# EAGLE board AK4493-v1.64_25 (EAGLE 9.6.2), part 1 of 2
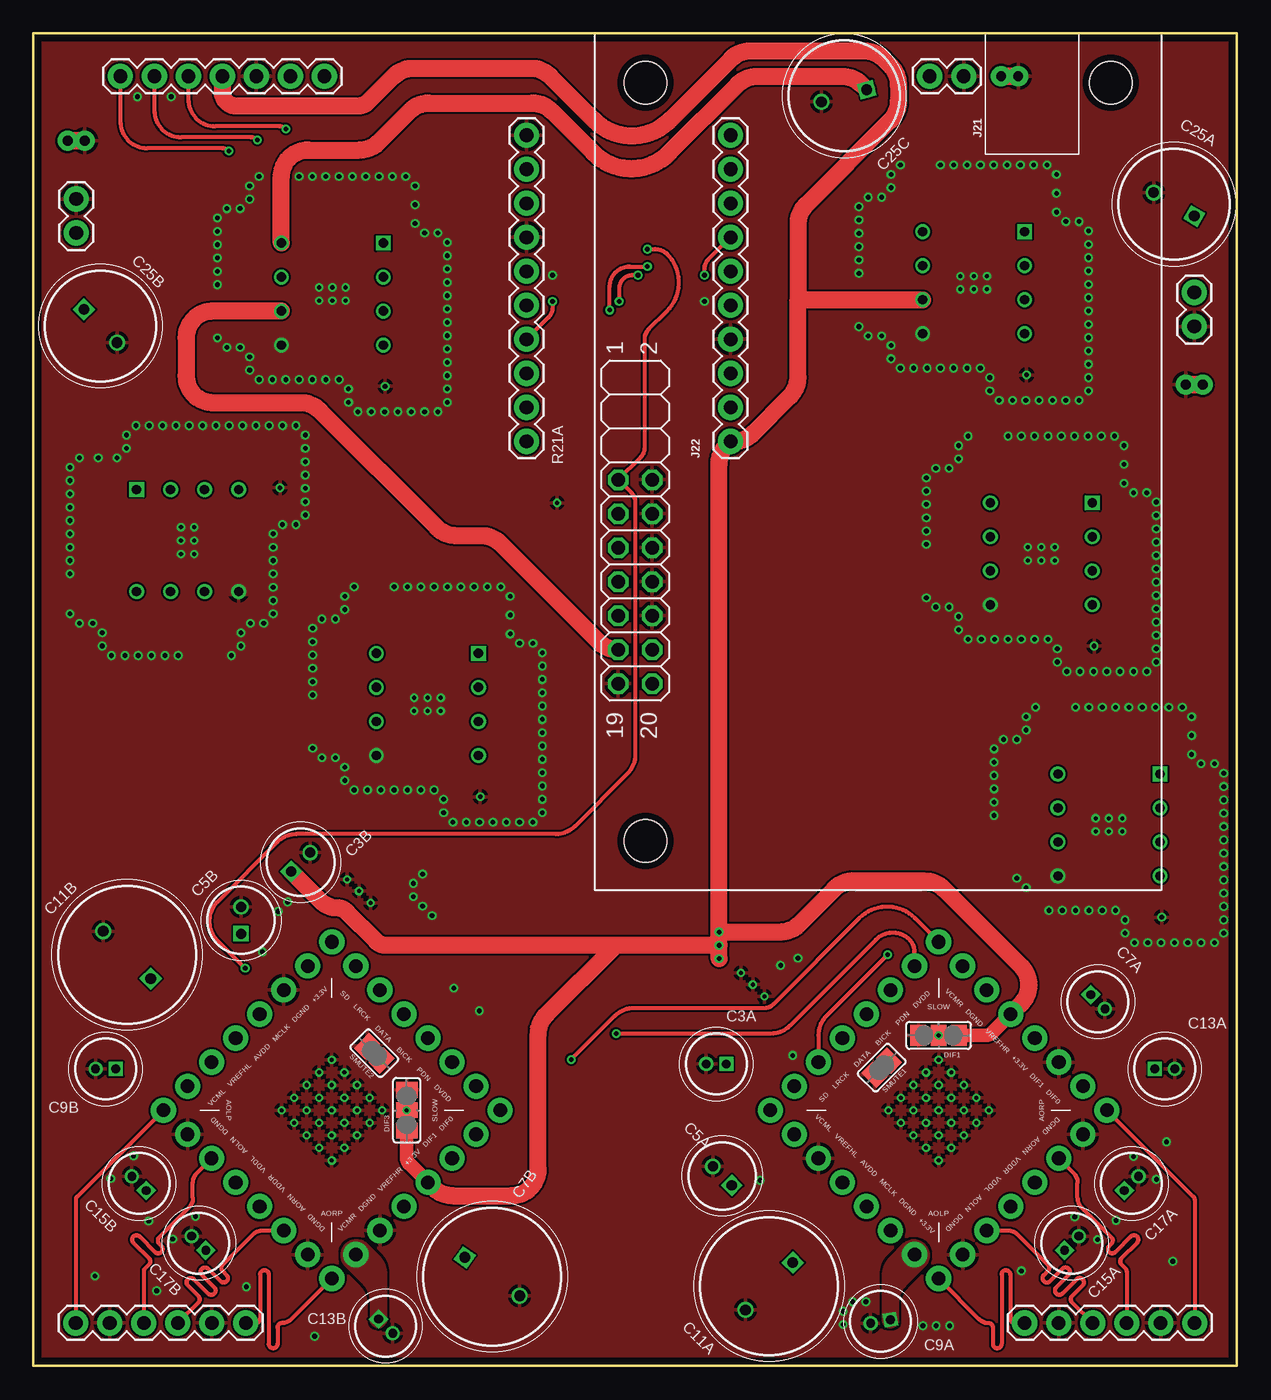
[diagram p0: board, top side]
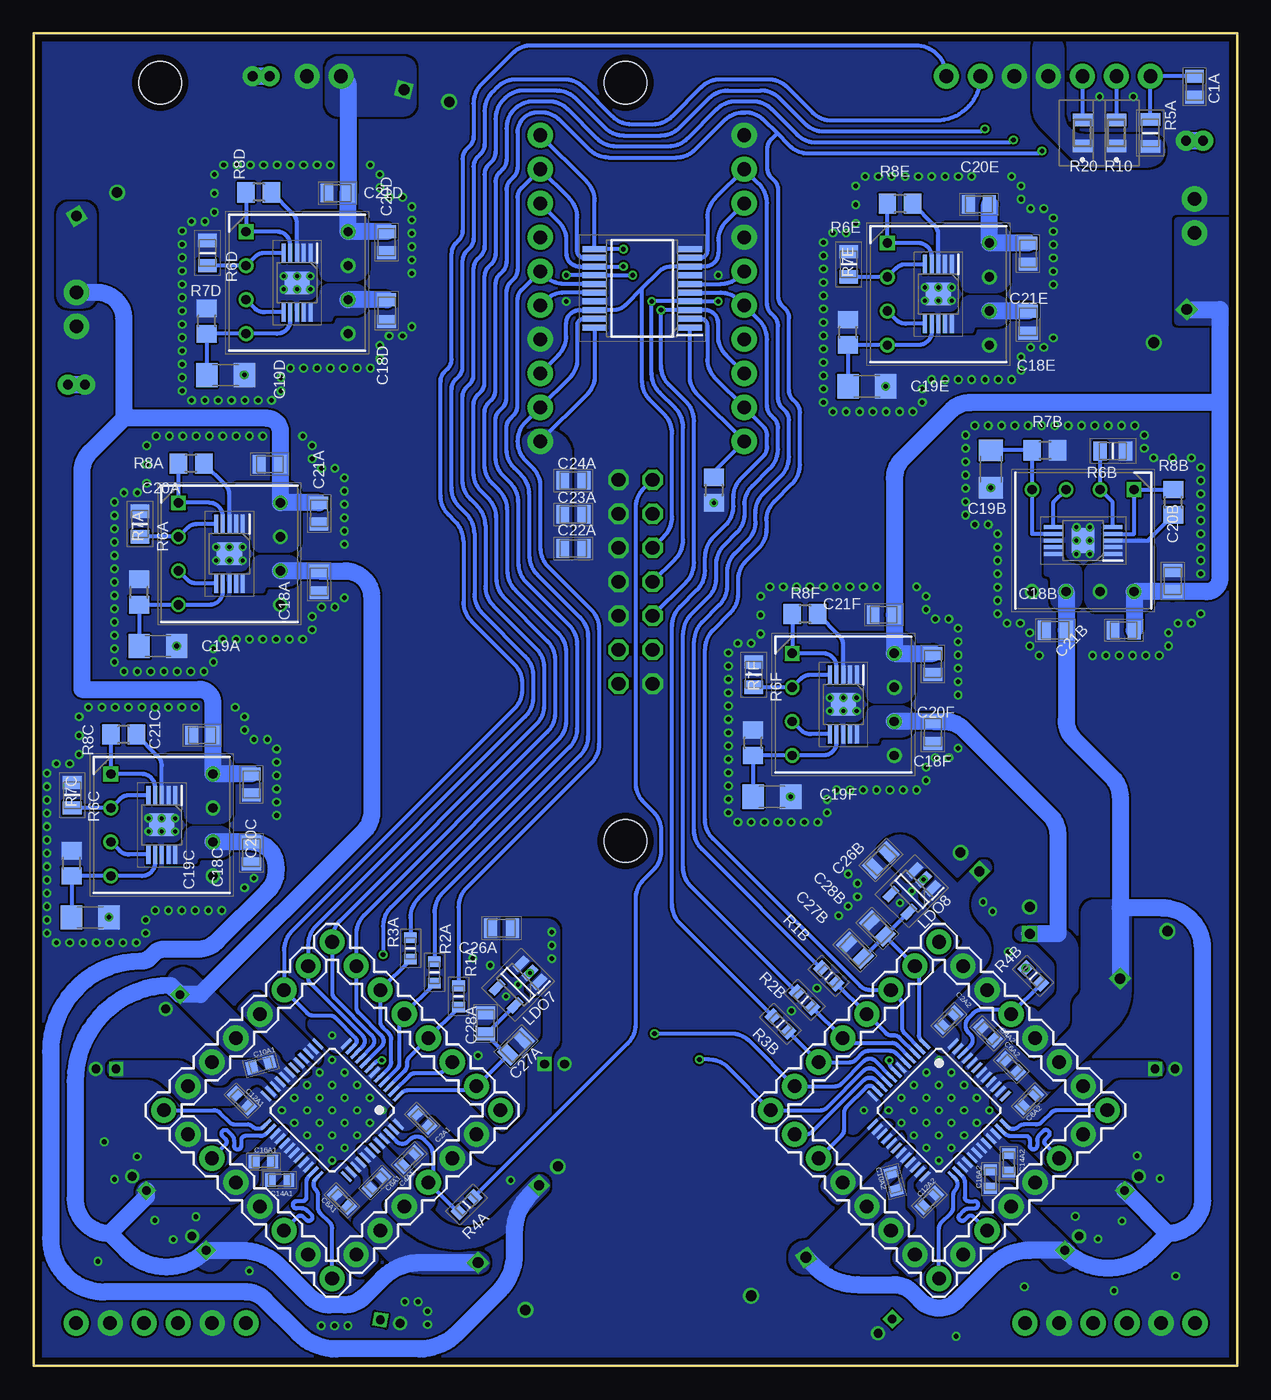
[diagram p1: board, bottom side, seen from below]

Size 89.89 x 99.5 mm. Coordinates in mm from the lower left corner, seen from the top.
Outline: 0,99.5 89.89,99.5 89.89,0 0,0 0,99.5
Copper layers (1*16): Top 0.035mm / dielectric 1.6mm / Bottom 0.035mm
Design rules "Elecrow_2-layer_PCB_eagle_rule": minimum track width 6mil, minimum drill 12mil, track to track 6mil, track to pad 6mil, pad to pad 6mil, via to via 8mil, smd to smd 0mil, copper to edge 20mil, drill to drill 10mil, minimum pad ring 6mil, minimum via ring 6mil, stop-mask expansion 0mil, vias tented up to drill 100mil, thermal gap 10mil
Net classes: 3 Power: width 1.27 mm, drill 1.27 mm, clearance 0.254 mm

## Footprints (pad centres in the part's own frame; a part is rotated, then mirrored left to right if it is on the bottom)
I2SOVERUSBV3 = drill 1.016 octagon: H3.7 33.322,1.745; H3.8 33.322,4.285; H3.9 35.862,1.745; H3.10 35.862,4.285; H3.11 38.403,1.745; H3.12 38.403,4.285; H3.13 40.943,1.745; H3.14 40.943,4.285; H3.15 43.483,1.745; H3.16 43.483,4.285; H3.17 46.023,1.745; H3.18 46.023,4.285; H3.19 48.562,1.745; H3.20 48.562,4.285 | hole 3.175: 3.688,3.775; 3.688,38.525; 60.312,3.775
CAPC2012X135N = smd 0.96 x 1.39: 1 -0.79,0; 2 0.79,0
CAPC1608X95N = smd 0.81 x 0.99: 1 -0.69,0; 2 0.69,0
CAPPRD150W45D450H600 = drill 0.65 pad 1.05 square: 1 0,0 | drill 0.65 pad 1.05: 2 1.5,0
CAPPRD200W55D500H800 = drill 0.75 pad 1.15 square: 1 0,0 | drill 0.75 pad 1.15: 2 2,0
CAPPRD500W60D1025H2150 = drill 0.8 pad 1.2 square: 1 0,0 | drill 0.8 pad 1.2: 2 5,0
CAPC2013X140N = smd 0.96 x 1.44: 1 -0.82,0; 2 0.82,0
C1206 = smd 1.6 x 1.8: 1 -1.4,0; 2 1.4,0 | drill 0.35: DGND 1.4,0
CAPPRD350W60D825H1300 = drill 0.8 pad 1.2 square: 1 0,0 | drill 0.8 pad 1.2: 2 3.5,0
SJ_2 = smd 1.168 x 1.6: 1 -1.524,0; 2 0,0; 3 1.524,0
SOP50P490X110-11N = smd 1.425 x 0.3: 1 -2.212,1; 2 -2.212,0.5; 3 -2.212,0; 4 -2.212,-0.5; 5 -2.212,-1; 6 2.212,-1; 7 2.212,-0.5; 8 2.212,0; 9 2.212,0.5; 10 2.212,1 | smd 1.68 x 1.88: 11 0,0 | drill 0.305 pad 0.61: P$1 -0.498,0; P$2 0.498,0; P$3 -0.498,0.995; P$4 0.498,0.995; P$5 -0.498,-0.995; P$6 0.498,-0.995
LQFP48_ = smd 0.25 x 1: 1 -2.75,-4.25; 2 -2.25,-4.25; 3 -1.75,-4.25; 4 -1.25,-4.25; 5 -0.75,-4.25; 6 -0.25,-4.25; 7 0.25,-4.25; 8 0.75,-4.25; 9 1.25,-4.25; 10 1.75,-4.25; 11 2.25,-4.25; 12 2.75,-4.25; 25 2.75,4.25; 26 2.25,4.25; 27 1.75,4.25; 28 1.25,4.25; 29 0.75,4.25; 30 0.25,4.25; 31 -0.25,4.25; 32 -0.75,4.25; 33 -1.25,4.25; 34 -1.75,4.25; 35 -2.25,4.25; 36 -2.75,4.25 | smd 1 x 0.25: 13 4.25,-2.75; 14 4.25,-2.25; 15 4.25,-1.75; 16 4.25,-1.25; 17 4.25,-0.75; 18 4.25,-0.25; 19 4.25,0.25; 20 4.25,0.75; 21 4.25,1.25; 22 4.25,1.75; 23 4.25,2.25; 24 4.25,2.75; 37 -4.25,2.75; 38 -4.25,2.25; 39 -4.25,1.75; 40 -4.25,1.25; 41 -4.25,0.75; 42 -4.25,0.25; 43 -4.25,-0.25; 44 -4.25,-0.75; 45 -4.25,-1.25; 46 -4.25,-1.75; 47 -4.25,-2.25; 48 -4.25,-2.75 | drill 0.305 pad 0.61: P$1 0,0; P$2 -1.327,0; P$3 -2.655,0; P$4 1.327,0; P$5 2.655,0; P$6 0,1.327; P$7 0,2.655; P$8 0,-1.327; P$9 0,-2.655; P$10 -1.327,-1.327; P$11 -2.655,-1.327; P$12 -2.655,-2.655; P$13 -1.327,-2.655; P$14 1.327,-2.655; P$15 2.655,-2.655; P$16 2.655,-1.327; P$17 1.327,-1.327; P$18 1.327,1.327; P$19 2.655,1.327; P$20 2.655,2.655; P$21 1.327,2.655; P$22 -1.327,2.655; P$23 -2.655,2.655; P$24 -2.655,1.327; P$25 -1.327,1.327
SOP65P780X200-20N = smd 1.8 x 0.45: 1 -3.55,2.925; 2 -3.55,2.275; 3 -3.55,1.625; 4 -3.55,0.975; 5 -3.55,0.325; 6 -3.55,-0.325; 7 -3.55,-0.975; 8 -3.55,-1.625; 9 -3.55,-2.275; 10 -3.55,-2.925; 11 3.55,-2.925; 12 3.55,-2.275; 13 3.55,-1.625; 14 3.55,-0.975; 15 3.55,-0.325; 16 3.55,0.325; 17 3.55,0.975; 18 3.55,1.625; 19 3.55,2.275; 20 3.55,2.925
1X02 = drill 1.016 pad 1.88: 1 0,0; 2 2.54,0
1X07 = drill 1.016 pad 1.88: 1 0,0; 2 2.54,0; 3 5.08,0; 4 7.62,0; 5 10.16,0; 6 12.7,0; 7 15.24,0
1X06 = drill 1.016 pad 1.88: 1 0,0; 2 2.54,0; 3 5.08,0; 4 7.62,0; 5 10.16,0; 6 12.7,0
DIPS762W51P254L1016H390Q8N = drill 0.7 pad 1.1 square: 1 0,0 | drill 0.7 pad 1.1: 2 0,-2.54; 3 0,-5.08; 4 0,-7.62; 5 7.62,-7.62; 6 7.62,-5.08; 7 7.62,-2.54; 8 7.62,0
1X10 = drill 1.016 pad 1.88: 1 0,0; 2 2.54,0; 3 5.08,0; 4 7.62,0; 5 10.16,0; 6 12.7,0; 7 15.24,0; 8 17.78,0; 9 20.32,0; 10 22.86,0
SOT95P280X145-5N = smd 1.2 x 0.6: 1 -1.25,0.95; 2 -1.25,0; 3 -1.25,-0.95; 4 1.25,-0.95; 5 1.25,0.95 | drill 0.305 pad 0.61: DGND -1.25,0; DGND2 0,0; DGND3 1.25,0
RESC1608X55N = smd 0.8 x 0.95: 1 -0.8,0; 2 0.8,0
RESC2012X50N = smd 0.95 x 1.45: 1 -1,0; 2 1,0
RESC2012X60N = smd 1 x 1.4: 1 -0.95,0; 2 0.95,0
R0805 = smd 1.3 x 1.5: 1 -0.95,0; 2 0.95,0
RCS0805_E3 = smd 0.95 x 1.45: 1 -0.975,0; 2 0.975,0
R0805-POL = smd 1.3 x 1.5: 1 -0.95,0; 2 0.95,0 | drill 0.305 pad 0.61: DGND 0.95,0
SHORT_ALL-50 = drill 0.737 pad 1.524: 1 -0.635,0; 2 0.635,0
SJ = smd 1.168 x 1.6: 1 -0.762,0; 2 0.762,0

## Placement (x,y rotation side)
BD1  I2SOVERUSBV3  [I2SOVERUSBV3]  41.93,99.5 270 top
C1A  0.1uF, X7R  [CAPC2012X135N]  3.19,95.52 270 bottom
C2A1  0.1u, Ceramic Capacitor X7R  [CAPC1608X95N]  60.87,18.35 315 bottom
C2A2  0.1u, Ceramic Capacitor X7R  [CAPC1608X95N]  21.55,25.82 45 bottom
C3A  80-A758BG106M1EAAE70  [CAPPRD150W45D450H600]  51.75,22.53 180 top
C3B  80-A758BG106M1EAAE70  [CAPPRD200W55D500H800]  19.25,36.9 45 top
C4A1  0.1u, Ceramic Capacitor X7R  [CAPC1608X95N]  61.86,15.42 45 bottom
C4A2  0.1u, Ceramic Capacitor X7R  [CAPC1608X95N]  18.62,24.83 135 bottom
C5A  80-A758BG106M1EAAE70  [CAPPRD200W55D500H800]  52.15,13.47 135 top
C5B  80-A758BG106M1EAAE70  [CAPPRD200W55D500H800]  15.5,32.26 90 top
C6A1  0.1u, Ceramic Capacitor X7R  [CAPC1608X95N]  64.3,13.68 225 bottom
C6A2  0.1u, Ceramic Capacitor X7R  [CAPC1608X95N]  16.88,22.39 315 bottom
C7A  RNU1A100MDSASQ  [CAPPRD150W45D450H600]  78.97,27.72 315 top
C7B  APSG160ELL222MJ20S  [CAPPRD500W60D1025H2150]  32.22,8.09 325 top
C8A1  0.1u, Ceramic Capacitor X7R  [CAPC1608X95N]  66.88,12.34 315 bottom
C8A2  0.1u, Ceramic Capacitor X7R  [CAPC1608X95N]  15.54,19.81 45 bottom
C9A  647-RNU1A100MDSASQ  [CAPPRD150W45D450H600]  64,3.44 190 top
C9B  647-RNU1A100MDSASQ  [CAPPRD150W45D450H600]  6.14,22.17 180 top
C10A1  0.1u, Ceramic Capacitor X7R  [CAPC1608X95N]  72.93,22.46 195 bottom
C10A2  0.1u, Ceramic Capacitor X7R  [CAPC1608X95N]  25.66,13.75 285 bottom
C11A  APSG160ELL222MJ20S  [CAPPRD500W60D1025H2150]  56.71,7.7 225 top
C11B  2200uF, 10V  [CAPPRD500W60D1025H2150]  8.75,28.92 135 top
C12A1  0.1u, Ceramic Capacitor X7R  [CAPC1608X95N]  74.34,19.8 315 bottom
C12A2  0.1u, Ceramic Capacitor X7R  [CAPC1608X95N]  23.01,12.34 45 bottom
C13A  647-RNU1A100MDSASQ  [CAPPRD150W45D450H600]  83.75,22.17 0 top
C13B  647-RNU1A100MDSASQ  [CAPPRD150W45D450H600]  25.77,3.49 315 top
C14A1  0.1u, Ceramic Capacitor X7R  [CAPC1608X95N]  71.53,13.86 180 bottom
C14A2  0.1u, Ceramic Capacitor X7R  [CAPC1608X95N]  17.06,15.15 270 bottom
C15A  647-RNU1A100MDSASQ  [CAPPRD150W45D450H600]  77.01,8.62 45 top
C15B  647-RNU1A100MDSASQ  [CAPPRD150W45D450H600]  8.41,13.08 135 top
C16A1  0.1u, Ceramic Capacitor X7R  [CAPC1608X95N]  72.74,15.24 0 bottom
C16A2  0.1u, Ceramic Capacitor X7R  [CAPC1608X95N]  18.45,13.95 90 bottom
C17A  647-RNU1A100MDSASQ  [CAPPRD150W45D450H600]  81.48,13.08 45 top
C17B  647-RNU1A100MDSASQ  [CAPPRD150W45D450H600]  12.88,8.62 135 top
C18A  4.7u  [CAPC2013X140N]  68.58,58.55 270 bottom
C18B  4.7u  [CAPC2013X140N]  13.6,54.93 180 bottom
C18C  4.7u  [CAPC2013X140N]  73.63,38.3 270 bottom
C18D  4.7u  [CAPC2013X140N]  63.53,78.8 270 bottom
C18E  4.7u  [CAPC2013X140N]  15.63,77.95 270 bottom
C18F  4.7u  [CAPC2013X140N]  22.73,47.3 270 bottom
C19A  22u  [C1206]  80.62,53.74 0 bottom
C19B  22u  [C1206]  18.41,66.97 270 bottom
C19C  22u  [C1206]  85.67,33.49 0 bottom
C19D  22u  [C1206]  75.57,73.99 0 bottom
C19E  22u  [C1206]  27.67,73.14 0 bottom
C19F  22u  [C1206]  34.77,42.49 0 bottom
C20A  10u  [CAPC2012X135N]  72.26,67.33 180 bottom
C20B  10u  [CAPC2012X135N]  4.82,58.61 90 bottom
C20C  10u  [CAPC2012X135N]  73.63,43.41 270 bottom
C20D  10u  [CAPC2012X135N]  63.53,83.91 270 bottom
C20E  10u  [CAPC2012X135N]  19.31,86.73 180 bottom
C20F  10u  [CAPC2012X135N]  22.73,52.41 270 bottom
C21A  0.1u  [CAPC2012X135N]  68.58,63.66 270 bottom
C21B  0.1u  [CAPC2012X135N]  8.49,54.93 180 bottom
C21C  0.1u  [CAPC2012X135N]  77.31,47.08 180 bottom
C21D  0.1u  [CAPC2012X135N]  67.21,87.58 180 bottom
C21E  0.1u  [CAPC2012X135N]  15.63,83.06 270 bottom
C21F  0.1u  [CAPC2012X135N]  26.41,56.08 180 bottom
C22A  0.1u, Ceramic Capacitor X7R  [CAPC2012X135N]  49.59,61.03 0 bottom
C23A  0.1u, Ceramic Capacitor X7R  [CAPC2012X135N]  49.59,63.57 0 bottom
C24A  0.1u, Ceramic Capacitor X7R  [CAPC2012X135N]  49.59,66.11 0 bottom
C25A  470u  [CAPPRD350W60D825H1300]  86.7,85.87 150 top
C25B  470u  [CAPPRD350W60D825H1300]  3.77,78.89 315 top
C25C  470u  [CAPPRD350W60D825H1300]  62.24,95.3 195 top
C26A  4.7u, Ceramic Capacitor X7R  [CAPC2013X140N]  54.96,32.68 180 bottom
C26B  4.7u, Ceramic Capacitor X7R  [CAPC2013X140N]  26.62,37.76 225 bottom
C27A  4.7u, Ceramic Capacitor X7R  [CAPC2013X140N]  53.87,23.84 45 bottom
C27B  4.7u, Ceramic Capacitor X7R  [CAPC2013X140N]  28.55,31.02 135 bottom
C28A  0.1u, Ceramic Capacitor X7R  [CAPC2012X135N]  56.14,25.57 90 bottom
C28B  0.1u, Ceramic Capacitor X7R  [CAPC2012X135N]  26.87,32.66 135 bottom
DIF1  [SJ_2]  67.61,24.67 0 top
DIF3  [SJ_2]  27.88,19.08 270 top
IC1  LT3042  [SOP50P490X110-11N]  75.28,60.64 270 bottom
IC2  AK4493  [LQFP48_]  67.61,19.08 135 bottom
IC3  AK4493  [LQFP48_]  22.28,19.08 225 bottom
IC4  LT3042  [SOP50P490X110-11N]  80.33,40.39 270 bottom
IC4A  SN74ABT273DBR  [SOP65P780X200-20N]  44.44,80.47 180 bottom
IC5  LT3042  [SOP50P490X110-11N]  11.51,61.63 180 bottom
IC6  LT3042  [SOP50P490X110-11N]  70.23,80.89 270 bottom
IC7  LT3042  [SOP50P490X110-11N]  29.43,49.39 270 bottom
IC8  LT3042  [SOP50P490X110-11N]  22.33,80.04 270 bottom
J1  [1X02]  3.19,84.6 90 top
J2  [1X02]  66.94,96.31 0 top
J3  [1X07]  6.49,96.31 0 top
J4  [1X06]  74.03,3.19 0 top
J5  [1X07]  80.18,19.08 45 bottom
J6  [1X07]  67.61,6.51 135 bottom
J7  [1X07]  55.03,19.08 225 bottom
J8  [1X07]  67.61,31.65 315 bottom
J9  [1X07]  22.28,6.51 135 bottom
J10  [1X07]  9.71,19.08 225 bottom
J11  [1X07]  22.28,31.65 315 bottom
J12  [1X07]  34.85,19.08 45 bottom
J13  [1X06]  3.16,3.19 0 top
J14  [1X02]  86.7,80.16 270 top
J15  XR2A-0811-N  [DIPS762W51P254L1016H390Q8N]  79.09,64.45 0 bottom
J16  XR2A-0811-N  [DIPS762W51P254L1016H390Q8N]  84.14,44.2 0 bottom
J17  XR2A-0811-N  [DIPS762W51P254L1016H390Q8N]  7.7,65.44 270 bottom
J18  XR2A-0811-N  [DIPS762W51P254L1016H390Q8N]  74.04,84.7 0 bottom
J19  XR2A-0811-N  [DIPS762W51P254L1016H390Q8N]  33.24,53.2 0 bottom
J20  XR2A-0811-N  [DIPS762W51P254L1016H390Q8N]  26.14,83.85 0 bottom
J21  [1X10]  36.82,91.9 270 top
J22  [1X10]  52.06,69.04 90 top
LDO7  LP5907-1.8V  [SOT95P280X145-5N]  53.72,28.46 225 bottom
LDO8  LP5907-1.8V  [SOT95P280X145-5N]  24.31,35.44 225 bottom
R1A  RT0603DRE075R1L  [RESC1608X55N]  58.17,27.57 270 bottom
R1B  RT0603DRE075R1L  [RESC1608X55N]  30.53,29.12 315 bottom
R2A  RT0603DRE075R1L  [RESC1608X55N]  59.96,29.37 270 bottom
R2B  RT0603DRE075R1L  [RESC1608X55N]  32.32,27.32 315 bottom
R3A  RT0603DRE075R1L  [RESC1608X55N]  61.76,31.16 270 bottom
R3B  RT0603DRE075R1L  [RESC1608X55N]  34.12,25.53 315 bottom
R4A  RT0603DRE075R1L  [RESC1608X55N]  57.57,12.04 225 bottom
R4B  RT0603DRE075R1L  [RESC1608X55N]  15.24,29.12 315 bottom
R5A  10K, Resistor 1%  [RESC2012X50N]  6.49,92.07 270 bottom
R6A  1k  [RESC2012X60N]  81.97,62.86 90 bottom
R6B  1k  [RESC2012X60N]  9.29,68.32 0 bottom
R6C  1k  [RESC2012X60N]  87.02,42.61 90 bottom
R6D  1k  [RESC2012X60N]  76.92,83.11 90 bottom
R6E  1k  [RESC2012X60N]  29.02,82.26 90 bottom
R6F  1k  [RESC2012X60N]  36.12,51.61 90 bottom
R7A  33k  [R0805]  82.02,57.78 90 bottom
R7B  33k  [R0805]  14.37,68.37 0 bottom
R7C  33k  [R0805]  87.07,37.53 90 bottom
R7D  33k  [R0805]  76.97,78.03 90 bottom
R7E  33k  [R0805]  29.07,77.18 90 bottom
R7F  33k  [R0805]  36.17,46.53 90 bottom
R8A  200k  [R0805]  78.14,67.38 180 bottom
R8B  200k  [R0805]  4.77,64.49 90 bottom
R8C  200k  [R0805]  83.19,47.13 180 bottom
R8D  200k  [R0805]  73.09,87.63 180 bottom
R8E  200k  [R0805]  25.19,86.78 180 bottom
R8F  200k  [R0805]  32.29,56.13 180 bottom
R10  2.2k, 1%  [RCS0805_E3]  9.03,92.07 90 bottom
R20  2.2k, 1%  [RCS0805_E3]  11.57,92.07 90 bottom
R21A  Not Pop.  [R0805-POL]  39.1,65.39 270 bottom
SH1  SHORTA5  [SHORT_ALL-50]  3.19,91.49 180 top
SH2  SHORTA5  [SHORT_ALL-50]  72.91,96.31 180 top
SH3  SHORTA5  [SHORT_ALL-50]  86.7,73.27 0 top
SMUTE1  [SJ]  63.35,22.26 225 top
SMUTE2  [SJ]  25.46,23.33 135 top

## Library data of the parts
BD1 = Dual Mono Amp Library; BOM: Yes; DESCRIPTION: Asynchronous audio transfer at sampling rates up to 768 kHz and 32 bit
C1A C21A C21B C21C C21D C21E C21F C22A C23A C24A C28A C28B = Dual Mono Amp Library; DESCRIPTION: Multilayer Ceramic Capacitors MLCC - SMD/SMT 0805 16VDC 0.1uF 10% X7R AEC-Q200; HEIGHT: 1.35mm; MANUFACTURER_NAME: TAIYO YUDEN; MANUFACTURER_PART_NUMBER: EMF212B7104KGHT; MOUSER_PART_NUMBER: 963-EMF212B7104KGHT; MOUSER_PRICE-STOCK: https://www.mouser.co.uk/ProductDetail/Taiyo-Yuden/EMF212B7104KGHT?qs=%252B6g0mu59x7JRGtoE3odDgw%3D%3D
C2A1 C2A2 C4A1 C4A2 C6A1 C6A2 C8A1 C8A2 C10A1 C10A2 C12A1 C12A2 C14A1 C14A2 C16A1 C16A2 = Dual Mono Amp Library; DESCRIPTION: EMK107B7104KA-T 0.1F +/-10% 16V Ceramic Capacitor X7R 0603; HEIGHT: 0.95mm; MANUFACTURER_NAME: TAIYO YUDEN; MANUFACTURER_PART_NUMBER: EMK107B7104KA-T; MOUSER_PART_NUMBER: 963-EMK107B7104KA-T; MOUSER_PRICE-STOCK: https://www.mouser.co.uk/ProductDetail/TAIYO-YUDEN/EMK107B7104KA-T?qs=I6KAKw0tg2ybqzX8hKPgfw%3D%3D
C3A C7A C9A C9B C13A C13B C15A C15B C17A C17B = Dual Mono Amp Library; DESCRIPTION: Aluminum Organic Polymer Capacitors 10 Volt 10uF 20%; HEIGHT: 6mm; MANUFACTURER_NAME: Nichicon; MANUFACTURER_PART_NUMBER: RNU1A100MDSASQ; MOUSER_PART_NUMBER: 647-RNU1A100MDSASQ; MOUSER_PRICE-STOCK: https://www.mouser.co.uk/ProductDetail/Nichicon/RNU1A100MDSASQ?qs=eL6fcoQH66Plszdei%2FxZtw%3D%3D
C3B C5A C5B = Dual Mono Amp Library; DESCRIPTION: A758, Aluminum, Polymer Aluminum, 10 uF, 20%, 25 VDC, -55/+105C, 105C, -55C, 105C, 5,000 Hrs, 10 % , 70 mOhms, 120 uA, 5mm, 7mm, Lead Spacing = 2mm, 19mm, 1000; HEIGHT: 8mm; MANUFACTURER_NAME: KEMET; MANUFACTURER_PART_NUMBER: A758BG106M1EAAE070; MOUSER_PART_NUMBER: 80-A758BG106M1EAAE70; MOUSER_PRICE-STOCK: https://www.mouser.co.uk/ProductDetail/KEMET/A758BG106M1EAAE070?qs=M6jHmRuQorU1WkHVIs6y3Q%3D%3D
C7B C11A C11B = Dual Mono Amp Library; DESCRIPTION: Aluminum Organic Polymer Capacitors 16V 2200uF 20% Tol.; HEIGHT: 21.5mm; MANUFACTURER_NAME: Chemi-Con; MANUFACTURER_PART_NUMBER: APSG160ELL222MJ20S; MOUSER_PART_NUMBER: 661-APSG160E222MJ20S; MOUSER_PRICE-STOCK: https://www.mouser.co.uk/ProductDetail/United-Chemi-Con/APSG160ELL222MJ20S?qs=nxZbHzLpdvcUAIXRVD5aZg%3D%3D
C18A C18B C18C C18D C18E C18F C26A C26B C27A C27B = Dual Mono Amp Library; DESCRIPTION: Taiyo Yuden 4.7uF Multilayer Ceramic Capacitor MLCC 16V dc +/-10% X5R Dielectric 0805 SMD, Max. Temp. +85C; HEIGHT: 1.4mm; MANUFACTURER_NAME: TAIYO YUDEN; MANUFACTURER_PART_NUMBER: EMK212ABJ475KG-T; MOUSER_PART_NUMBER: 963-EMK212ABJ475KG-T; MOUSER_PRICE-STOCK: https://www.mouser.co.uk/ProductDetail/Taiyo-Yuden/EMK212ABJ475KG-T?qs=Va%252BXcMGJzEtDqSLhA2RQmA%3D%3D
C19A C19B C19C C19D C19E C19F = Dual Mono Amp Library; DESCRIPTION: Multilayer Ceramic Capacitors MLCC - SMD/SMT 22uF 16V X7R +/-20% 1206 Gen Purp; HEIGHT: 1.8mm; MANUFACTURER_NAME: TAIYO YUDEN; MANUFACTURER_PART_NUMBER: EMK316BB7226ML-T; MOUSER_PART_NUMBER: 963-EMK316BB7226ML-T; MOUSER_PRICE-STOCK: https://www.mouser.co.uk/ProductDetail/TAIYO-YUDEN/EMK316BB7226ML-T?qs=EPmvyOv1YlPvyo1ebMxtFg%3D%3D
C20A C20B C20C C20D C20E C20F = Dual Mono Amp Library; DESCRIPTION: Multilayer Ceramic Capacitors MLCC - SMD/SMT 10uF 16V X7R 10% 0805; HEIGHT: 1.35mm; MANUFACTURER_NAME: TAIYO YUDEN; MANUFACTURER_PART_NUMBER: EMK212BB7106KG-T; MOUSER_PART_NUMBER: 963-EMK212BB7106KG-T; MOUSER_PRICE-STOCK: https://www.mouser.co.uk/ProductDetail/TAIYO-YUDEN/EMK212BB7106KG-T?qs=vF%252B8ahGVilemLVRka0hELA%3D%3D
C25A C25B C25C = Dual Mono Amp Library; DESCRIPTION: Cap Aluminum Polymer 470uF 16VDC 20% (8 X 11.5mm) Radial 3.5mm 0.01 Ohm 5400mA 2000h 105C Bulk; HEIGHT: 13mm; MANUFACTURER_NAME: Nichicon; MANUFACTURER_PART_NUMBER: RNE1C471MDN1; MOUSER_PART_NUMBER: 647-RNE1C471MDN; MOUSER_PRICE-STOCK: https://www.mouser.co.uk/ProductDetail/Nichicon/RNE1C471MDN1?qs=3cDLNOBdYaXMZQrMc3zVvg%3D%3D
DIF1 DIF3 IC2 IC3 J1 J2 J14 SMUTE1 SMUTE2 = Dual Mono Amp Library
IC1 IC4-IC8 = Dual Mono Amp Library; DESCRIPTION: LINEAR TECHNOLOGY - LT3042EMSE#PBF - LDO, ADJ, 0.2A, 0V-15V, MSOP-10; HEIGHT: 1.1mm; MANUFACTURER_NAME: Linear Technology; MANUFACTURER_PART_NUMBER: LT3042EMSE#PBF; MOUSER_PART_NUMBER: 584-LT3042EMSE#PBF; MOUSER_PRICE-STOCK: https://www.mouser.co.uk/ProductDetail/Analog-Devices-Linear-Technology/LT3042EMSEPBF?qs=oahfZPh6IAJ3XP16d20ITw%3D%3D
IC4A = Dual Mono Amp Library; DESCRIPTION: Octal Edge-Triggered D-Type Flip-Flops With Clear; HEIGHT: 2mm; MANUFACTURER_NAME: Texas Instruments; MANUFACTURER_PART_NUMBER: SN74ABT273DBR; MOUSER_PART_NUMBER: 595-SN74ABT273DBR; MOUSER_PRICE-STOCK: https://www.mouser.co.uk/ProductDetail/Texas-Instruments/SN74ABT273DBR?qs=X1HXWTtiZ0RWq%2Fv0JNOEpw%3D%3D
J3 J5-J12 = Dual Mono Amp Library; PROD_ID: Combine 8288+14485
J4 J13 = Dual Mono Amp Library; PROD_ID: CONN-08437
J15-J20 = XR2A-0811-N; ARROW_PART_NUMBER: XR2A-0811-N; ARROW_PRICE-STOCK: https://www.arrow.com/en/products/xr2a-0811-n/omron?region=nac; DESCRIPTION: IC & Component Sockets Socket DIP Term 8P 7.62mm .25AuPlate; HEIGHT: 3.9mm; MANUFACTURER_NAME: Omron Electronics; MANUFACTURER_PART_NUMBER: XR2A-0811-N; MOUSER_PART_NUMBER: 653-XR2A-0811-N; MOUSER_PRICE-STOCK: https://www.mouser.co.uk/ProductDetail/Omron-Electronics/XR2A-0811-N?qs=WOBxwZpV8jWLu7CcbwkK0Q%3D%3D
J21 J22 = SparkFun-Connectors; PROD_ID: CONN-11563
LDO7 LDO8 = Dual Mono Amp Library; ARROW_PART_NUMBER: LP5907MFX-1.8/NOPB; ARROW_PRICE-STOCK: https://www.arrow.com/en/products/lp5907mfx-1.8nopb/texas-instruments?region=nac; DESCRIPTION: 250-mA ultra-low-noise low-IQ low-dropout (LDO) linear regulator; HEIGHT: 1.45mm; MANUFACTURER_NAME: Texas Instruments; MANUFACTURER_PART_NUMBER: LP5907MFX-1.8/NOPB; MOUSER_PART_NUMBER: 595-LP5907MFX-1.8NPB; MOUSER_PRICE-STOCK: https://www.mouser.co.uk/ProductDetail/Texas-Instruments/LP5907MFX-1.8-NOPB?qs=biyDIajrTn5jh5ArkSZeqw%3D%3D
R1A R1B R2A R2B R3A R3B R4A R4B = Dual Mono Amp Library; DESCRIPTION: Thin Film Resistors - SMD 1/10W 5.1 ohm .5% 50ppm; HEIGHT: 0.55mm; MANUFACTURER_NAME: YAGEO; MANUFACTURER_PART_NUMBER: RT0603DRE075R1L
R5A = Dual Mono Amp Library; DESCRIPTION: Res Thick Film 0805 10K Ohm 1% 0.4W +/-100ppm/C Pad SMD Automotive T/R; HEIGHT: 0.5mm; MANUFACTURER_NAME: Vishay; MANUFACTURER_PART_NUMBER: RCS080510K0FKEA; MOUSER_PART_NUMBER: 71-RCS080510K0FKEA; MOUSER_PRICE-STOCK: https://www.mouser.com/Search/Refine.aspx?Keyword=71-RCS080510K0FKEA
R6A R6B R6C R6D R6E R6F = Dual Mono Amp Library; DESCRIPTION: BOURNS - CHP0805-FX-1001ELF - SMD Chip Resistor, 0805 [2012 Metric], 1 kohm, CHP Series, 200 V, Thick Film, 500 mW; HEIGHT: 0.6mm; MANUFACTURER_NAME: Bourns; MANUFACTURER_PART_NUMBER: CHP0805-FX-1001ELF; MOUSER_PART_NUMBER: 652-CHP0805FX1001ELF; MOUSER_PRICE-STOCK: https://www.mouser.co.uk/ProductDetail/Bourns/CHP0805-FX-1001ELF?qs=lc2O%252BfHJPVYkHmuBCgSoNQ%3D%3D
R7A R7B R7C R7D R7E R7F = Dual Mono Amp Library; DESCRIPTION: NEOHM - TE CONNECTIVITY - CPF0805B51KE1 - SMD Chip Resistor, 51 kohm, +/- 0.1%, 100 mW, 0805 [2012 Metric], Thin Film, Precision Low TCR; HEIGHT: 0.65mm; MANUFACTURER_NAME: TE Connectivity; MANUFACTURER_PART_NUMBER: CPF0805B51KE1; MOUSER_PART_NUMBER: 279-CPF0805B51KE1; MOUSER_PRICE-STOCK: https://www.mouser.co.uk/ProductDetail/TE-Connectivity-Holsworthy/CPF0805B51KE1?qs=iJVBkmKXgrkfOCLIw017vA%3D%3D
R8A R8B R8C R8D R8E R8F = Dual Mono Amp Library; DESCRIPTION: RESISTOR, 0805 200 KOhm +/- 0.5% 0.1 W; HEIGHT: mm; MANUFACTURER_NAME: Susumu; MANUFACTURER_PART_NUMBER: RR1220P-204-D; MOUSER_PART_NUMBER: 754-RR1220P-204D; MOUSER_PRICE-STOCK: https://www.mouser.com/Search/Refine.aspx?Keyword=754-RR1220P-204D
R10 R20 = Dual Mono Amp Library; DESCRIPTION: Res Thick Film 0805 2.2K Ohm 1% 0.4W +/-100ppm/C Conformal Coated Pad SMD T/R; HEIGHT: mm; MANUFACTURER_NAME: Vishay; MANUFACTURER_PART_NUMBER: RCS08052K20FKEA; MOUSER_PART_NUMBER: 71-RCS08052K20FKEA; MOUSER_PRICE-STOCK: https://www.mouser.com/Search/Refine.aspx?Keyword=71-RCS08052K20FKEA
R21A = Dual Mono Amp Library; SPICEPREFIX: R
SH1-SH3 = Dual Mono Amp Library; BOM: No; DESCRIPTION: Short between two nets

## Nets
+3V3: C2A1.1 C2A2.1 C3A.1 C3B.1 C18D.1 C22A.1 C23A.1 C24A.1 C26A.1 C26B.1 DIF1.3 DIF3.3 IC2.14 IC2.15 IC2.17 IC2.48 IC3.14 IC3.15 IC3.17 IC3.48 IC4A.20 IC6.9 IC6.10 J3.4 J5.5 J7.2 J9.5 J11.2 J18.6 J22.1 LDO7.1 LDO7.3 LDO8.1 LDO8.3 R5A.2 R10.1 R20.1
+5V/1: C6A1.1 C7A.1 C10A1.1 C11A.1 C14A1.1 C15A.1 C16A1.1 C17A.1 C18A.1 IC1.9 IC1.10 IC2.19 IC2.20 IC2.27 IC2.28 IC2.33 IC2.34 IC2.41 IC2.42 J5.4 J6.4 J6.5 J7.6 J15.6
+5V/2: C6A2.1 C7B.1 C10A2.1 C11B.1 C14A2.1 C15B.1 C16A2.1 C17B.1 C18B.1 IC3.19 IC3.20 IC3.27 IC3.28 IC3.33 IC3.34 IC3.41 IC3.42 IC5.9 IC5.10 J9.4 J10.4 J10.5 J11.6 J17.6
+5V/3: BD1.H3.17 C18E.1 IC8.9 IC8.10 J20.6
+5V/4: C4A2.1 C5B.1 C18F.1 IC3.44 IC7.9 IC7.10 J11.5 J19.6
+5V/5: C4A1.1 C5A.1 C18C.1 IC2.44 IC4.9 IC4.10 J7.5 J16.6
BCLK: BD1.H3.11 IC4A.8 IC4A.18 J21.3 J22.3
DATA: BD1.H3.13 IC4A.4 IC4A.14 J21.7 J22.7
DGND: BD1.H3.8 BD1.H3.10 BD1.H3.12 BD1.H3.14 BD1.H3.16 BD1.H3.19 C1A.2 C2A1.2 C2A2.2 C3A.2 C3B.2 C4A1.2 C4A2.2 C5A.2 C5B.2 C6A1.2 C6A2.2 C7A.2 C7B.2 C8A1.2 C8A2.2 C9A.2 C9B.2 C10A1.2 C10A2.2 C11A.2 C11B.2 C12A1.2 C12A2.2 C13A.2 C13B.2 C14A1.2 C14A2.2 C15A.2 C15B.2 C16A1.2 C16A2.2 C17A.2 C17B.2 C18A.2 C18B.2 C18C.2 C18D.2 C18E.2 C18F.2 C19A.2 C19A.DGND C19B.2 C19B.DGND C19C.2 C19C.DGND C19D.2 C19D.DGND C19E.2 C19E.DGND C19F.2 C19F.DGND C20A.2 C20B.2 C20C.2 C20D.2 C20E.2 C20F.2 C21A.2 C21B.2 C21C.2 C21D.2 C21E.2 C21F.2 C22A.2 C23A.2 C24A.2 C25A.2 C25B.2 C25C.2 C26A.2 C26B.2 C27A.2 C27B.2 C28A.2 C28B.2 DIF1.1 DIF3.1 IC1.8 IC1.11 IC1.P$1 IC1.P$2 IC1.P$3 IC1.P$4 IC1.P$5 IC1.P$6 IC2.6 IC2.13 IC2.16 IC2.21 IC2.22 IC2.24 IC2.29 IC2.30 IC2.31 IC2.32 IC2.39 IC2.40 IC2.45 IC2.47 IC2.P$1 IC2.P$2 IC2.P$3 IC2.P$4 IC2.P$5 IC2.P$6 IC2.P$7 IC2.P$8 IC2.P$9 IC2.P$10 IC2.P$11 IC2.P$12 IC2.P$13 IC2.P$14 IC2.P$15 IC2.P$16 IC2.P$17 IC2.P$18 IC2.P$19 IC2.P$20 IC2.P$21 IC2.P$22 IC2.P$23 IC2.P$24 IC2.P$25 IC3.6 IC3.13 IC3.16 IC3.21 IC3.22 IC3.24 IC3.29 IC3.30 IC3.31 IC3.32 IC3.39 IC3.40 IC3.45 IC3.47 IC3.P$1 IC3.P$2 IC3.P$3 IC3.P$4 IC3.P$5 IC3.P$6 IC3.P$7 IC3.P$8 IC3.P$9 IC3.P$10 IC3.P$11 IC3.P$12 IC3.P$13 IC3.P$14 IC3.P$15 IC3.P$16 IC3.P$17 IC3.P$18 IC3.P$19 IC3.P$20 IC3.P$21 IC3.P$22 IC3.P$23 IC3.P$24 IC3.P$25 IC4.8 IC4.11 IC4.P$1 IC4.P$2 IC4.P$3 IC4.P$4 IC4.P$5 IC4.P$6 IC4A.7 IC4A.10 IC4A.17 IC5.8 IC5.11 IC5.P$1 IC5.P$2 IC5.P$3 IC5.P$4 IC5.P$5 IC5.P$6 IC6.8 IC6.11 IC6.P$1 IC6.P$2 IC6.P$3 IC6.P$4 IC6.P$5 IC6.P$6 IC7.8 IC7.11 IC7.P$1 IC7.P$2 IC7.P$3 IC7.P$4 IC7.P$5 IC7.P$6 IC8.8 IC8.11 IC8.P$1 IC8.P$2 IC8.P$3 IC8.P$4 IC8.P$5 IC8.P$6 J1.2 J2.2 J3.5 J4.2 J4.5 J5.3 J6.2 J6.7 J7.3 J9.3 J10.2 J10.7 J11.3 J13.2 J13.5 J14.2 J15.5 J16.5 J17.5 J18.5 J19.5 J20.5 J21.1 J21.4 J22.4 LDO7.2 LDO7.DGND LDO7.DGND2 LDO7.DGND3 LDO8.2 LDO8.DGND LDO8.DGND2 LDO8.DGND3 R6A.2 R6B.2 R6C.2 R6D.2 R6E.2 R6F.2 R7A.2 R7B.2 R7C.2 R7D.2 R7E.2 R7F.2 R21A.2 R21A.DGND SH1.1 SH2.1 SH3.1 SMUTE1.2 SMUTE2.2
DIF0: IC2.10 J3.6 J5.7
DIF1: IC2.11 J3.7 J5.6
LRCK: BD1.H3.15 IC4A.3 IC4A.13 J21.8 J22.8
MCLK: BD1.H3.7 IC4A.11 J22.10 R4A.1 R4B.1
N$1: IC4A.1 J21.10 R21A.1
N$2: C8A2.1 C9B.1 IC3.38 J11.7
N$4: IC4A.6 J21.5
N$5: IC4A.16 J22.5
N$14: C19A.1 IC1.7 J15.4 R7A.1
N$17: IC5.4 J17.1 R8B.2
N$18: IC5.6 J17.3
N$19: IC2.5 J8.3 R3A.2
N$20: IC2.4 J8.4 R2A.2
N$21: IC2.3 J8.5 R1A.2
N$22: IC5.5 J17.2 R6B.1
N$23: IC4A.19 J22.2 R1A.1
N$24: IC4A.15 J22.6 R2A.1
N$25: IC4A.12 J22.9 R3A.1
N$26 [R_Audio]: IC2.26 J4.4 J6.6
N$27: IC3.3 J12.5 R1B.2
N$28: IC3.4 J12.4 R2B.2
N$29: IC3.5 J12.3 R3B.2
N$30: IC4A.9 J21.2 R1B.1
N$31: IC4A.5 J21.6 R2B.1
N$32: IC4A.2 J21.9 R3B.1
N$34: IC6.4 J18.1 R8D.2
N$35: IC3.46 J11.4 R4B.2
N$36: IC7.5 J19.2 R6F.1
N$37: C27A.1 C28A.1 IC2.1 J8.7 LDO7.5
N$38: IC6.6 J18.3
N$40: IC6.5 J18.2 R6D.1
N$41: IC1.6 J15.3
N$42: C19D.1 IC6.7 J18.4 R7D.1
N$43: IC7.4 J19.1 R8F.2
N$46: C19F.1 IC7.7 J19.4 R7F.1
N$47: IC8.4 J20.1 R8E.2
N$51: IC8.6 J20.3
N$52: IC8.5 J20.2 R6E.1
N$53: C19E.1 IC8.7 J20.4 R7E.1
N$66: C27B.1 C28B.1 IC3.1 J12.7 LDO8.5
N$69: C12A1.1 C13A.1 IC2.23 J5.2
N$79: IC3.36 J10.1 J13.1
N$80: IC3.25 J9.1 J13.6
N$81: IC3.10 J9.7
N$82 [L_Audio]: IC2.36 J4.1 J6.1
N$83 [L_Audio]: IC2.35 J4.3 J6.3
N$87: IC3.35 J10.3 J13.3
N$88: IC3.26 J10.6 J13.4
N$90: IC2.25 J4.6 J5.1
N$96: IC2.46 J7.4 R4A.2
N$101: C12A2.1 C13B.1 IC3.23 J9.2
N$102: C8A1.1 C9A.1 IC2.38 J7.7
N$103: C19B.1 IC5.7 J17.4 R7B.1
N$104: IC1.4 J15.1 R8A.2
N$105: DIF1.2 IC2.12
N$106: IC2.7 SMUTE1.1
N$107: DIF3.2 IC3.12
N$108: C19C.1 IC4.7 J16.4 R7C.1
N$109: IC4.6 J16.3
N$110: IC4.5 J16.2 R6C.1
N$111: IC1.5 J15.2 R6A.1
N$112: IC7.6 J19.3
N$113: IC4.4 J16.1 R8C.2
N$114: IC3.7 SMUTE2.1
N$116: IC3.11 J9.6
PDN: C1A.1 IC2.2 IC3.2 J3.1 J8.6 J12.6 R5A.1
SCL0: IC2.8 IC3.8 J3.2 J8.2 J12.2 R10.2
SDA0: IC2.9 IC3.9 J3.3 J8.1 J12.1 R20.2
VCC/1: C20B.1 C20F.1 C21B.1 C21F.1 C25B.1 IC5.1 IC5.2 IC5.3 IC7.1 IC7.2 IC7.3 J1.1 J17.7 J17.8 J19.7 J19.8 R8B.1 R8F.1
VCC/2: C20D.1 C20E.1 C21D.1 C21E.1 C25C.1 IC6.1 IC6.2 IC6.3 IC8.1 IC8.2 IC8.3 J2.1 J18.7 J18.8 J20.7 J20.8 R8D.1 R8E.1
VCC/3: C20A.1 C20C.1 C21A.1 C21C.1 C25A.1 IC1.1 IC1.2 IC1.3 IC4.1 IC4.2 IC4.3 J14.1 J15.7 J15.8 J16.7 J16.8 R8A.1 R8C.1